# EAGLE board Microcontroller (EAGLE 9.3.0)
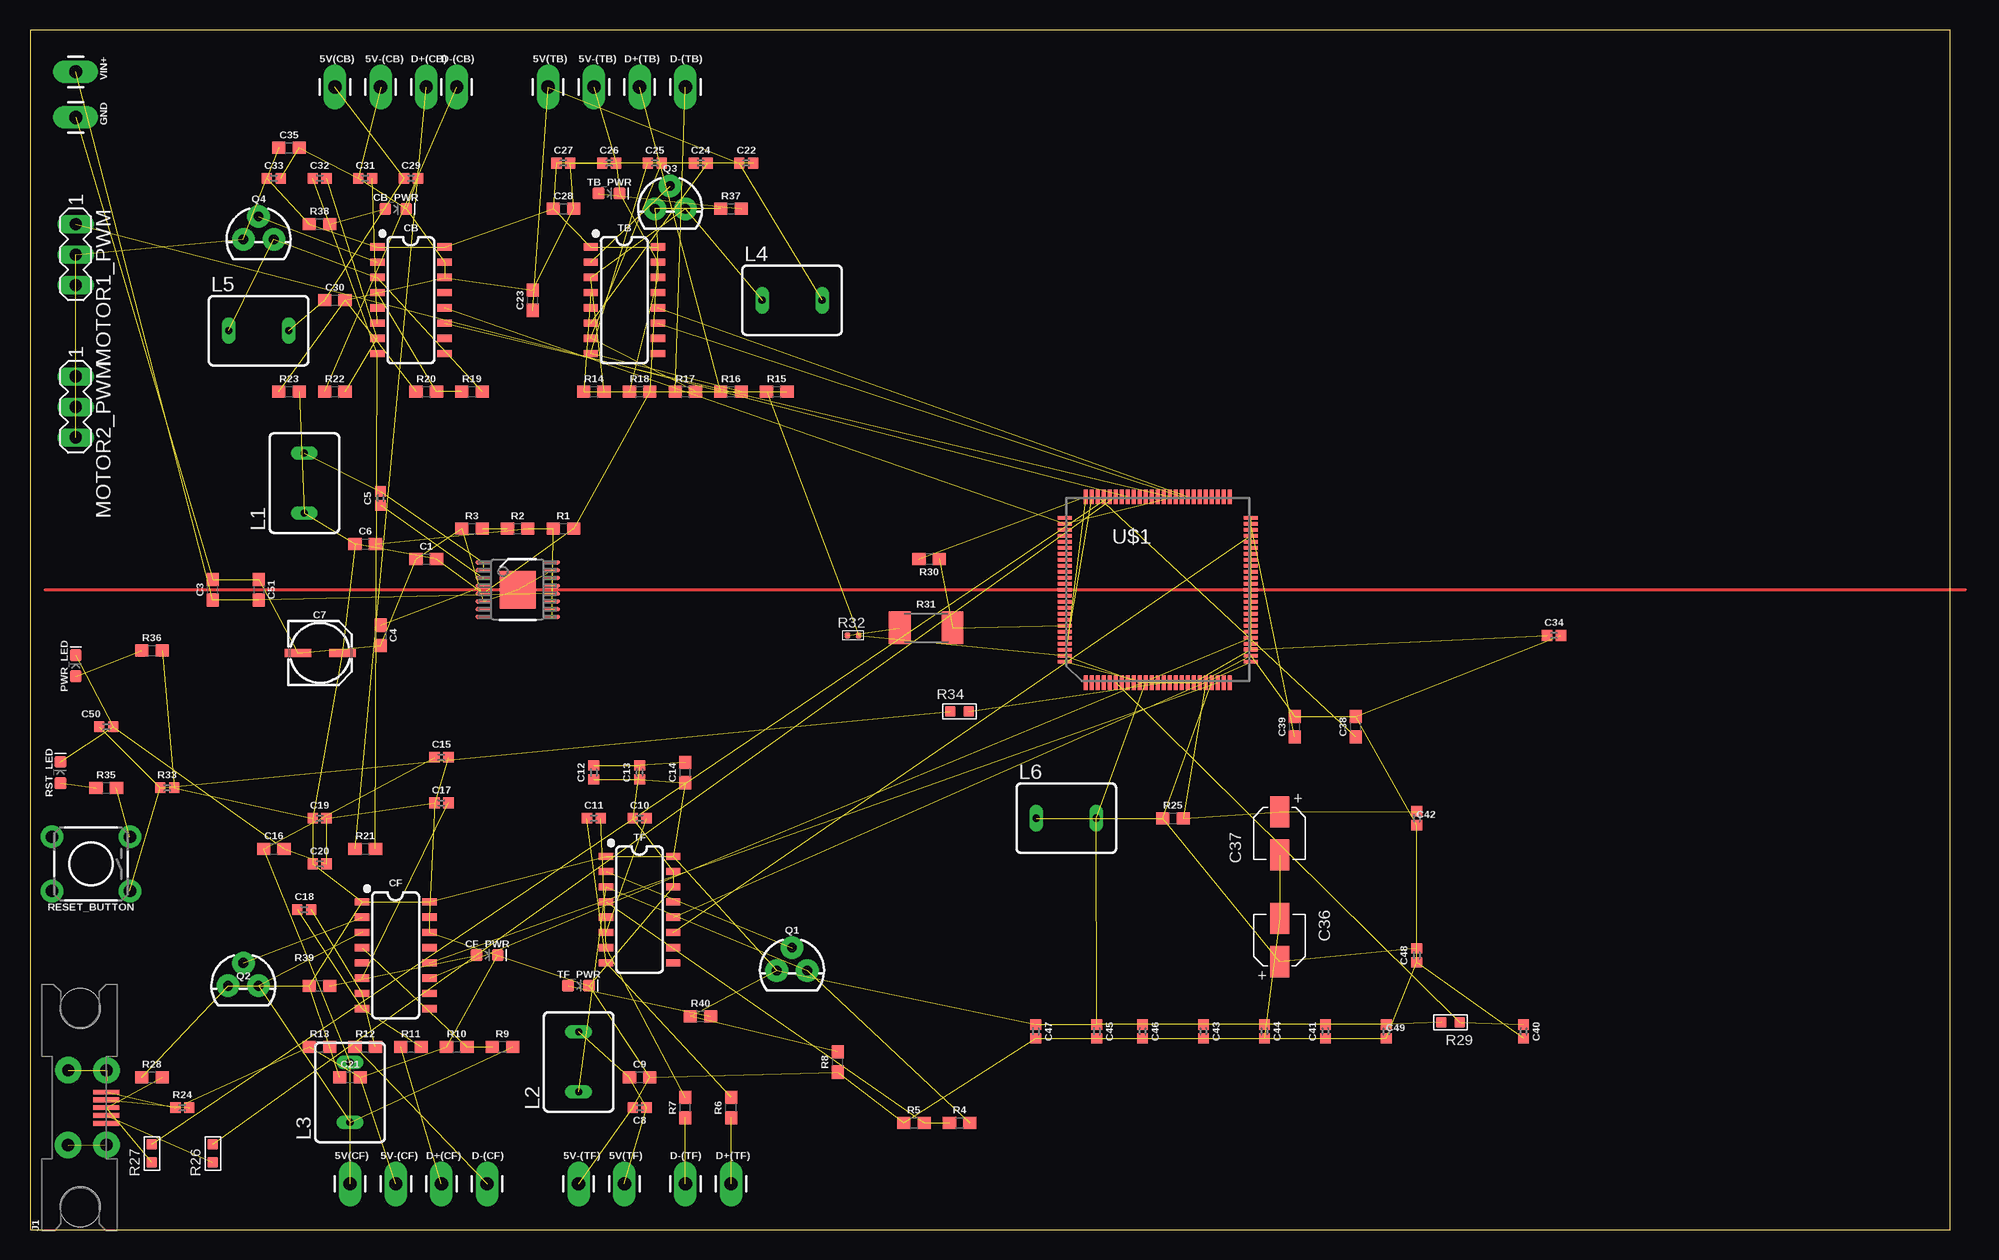
[diagram p0: board, top side]

Size 160 x 100 mm. Coordinates in mm from the lower left corner, seen from the top.
Outline: 0,0 160,0 160,100 0,100 0,0
Copper layers (1*16): Top 0.035mm / dielectric 1.5mm / Bottom 0.035mm
Design rules "default": minimum track width 6mil, minimum drill 0.35mm, track to track 6mil, track to pad 6mil, pad to pad 6mil, via to via 6mil, smd to smd 6mil, copper to edge 40mil, drill to drill 6mil, minimum pad ring 10mil, minimum via ring 8mil, stop-mask expansion 4mil, vias tented up to drill 0mil, thermal gap 10mil

## Footprints (pad centres in the part's own frame; a part is rotated, then mirrored left to right if it is on the bottom)
1X01_LONGPAD = drill 1.118 pad 1.88 long: 1 0,0
0603 = smd 1.1 x 1: 1 -0.85,0; 2 0.85,0
0402 = smd 0.85 x 0.9: 1 -0.58,0; 2 0.58,0
PANASONIC_C = smd 2.2 x 0.65: + 1.9,-0.2; - -1.8,-0.2
2.6X1.6X1(BXCXA) = smd 2.6 x 1.6: 1 1.8,0; 2 -1.8,0
SO16 = smd 0.6 x 1.2: 1 -4.445,-2.8; 2 -3.175,-2.8; 3 -1.905,-2.8; 4 -0.635,-2.8; 5 0.635,-2.8; 6 1.905,-2.8; 7 3.175,-2.8; 8 4.445,-2.8; 9 4.445,2.8; 10 3.175,2.8; 11 1.905,2.8; 12 0.635,2.8; 13 -0.635,2.8; 14 -1.905,2.8; 15 -3.175,2.8; 16 -4.445,2.8
LED-0603 = smd 1 x 1: A -0.877,0; C 0.877,0
USB_MICROB_VERTICAL = smd 0.4 x 2.2: D+ 0,0; D- -0.65,0; GND 1.3,0; ID 0.65,0; VBUS -1.3,0 | drill 1.016 pad 2.2: SHLD1 -3.121,3.183; SHLD2 3.122,3.16; SHLD3 -3.098,-0.027; SHLD4 3.108,-0.026 | hole 3.3: -8.275,2.17; 8.275,2.17
BS75 = drill 0.6 long: 1 -2.5,0; 2 2.5,0
MA03-1 = drill 1.016 long: 1 -2.54,0; 2 0,0; 3 2.54,0
TO-92-EZ = drill 0.813 pad 1.88: 1 -1.27,0; 2 0,1.905; 3 1.27,0
R0603 = smd 0.889 x 0.889: 1 0,0.762; 2 0,-0.762
2010 = smd 1.8 x 2.7: 1 -2.2,0; 2 2.2,0
R0402 = smd 0.5 x 0.5: 1 0,0.463; 2 0,-0.463
TACTILE_SWITCH_PTH_6.0MM = drill 1.016 pad 1.88: 1 -3.251,2.261; 2 3.251,2.261; 3 -3.251,-2.261; 4 3.251,-2.261
PWP0016F = smd 1.3 x 0.35: 1 -2.875,2.275; 2 -2.875,1.625; 3 -2.875,0.975; 4 -2.875,0.325; 5 -2.875,-0.325; 6 -2.875,-0.975; 7 -2.875,-1.625; 8 -2.875,-2.275; 9 2.875,-2.275; 10 2.875,-1.625; 11 2.875,-0.975; 12 2.875,-0.325; 13 2.875,0.325; 14 2.875,0.975; 15 2.875,1.625; 16 2.875,2.275 | smd 3 x 3.1: 17 0,0 | smd 0.4 x 0.4: V -1,0
LQFP100 = smd 1.2 x 0.3: BOOT0 -7.75,-3; PA3 7.75,-6.016; PA4 7.75,-4.5; PA5 7.75,-4; PA6 7.75,-3.5; PA7 7.75,-3; PA14 -7.75,6; PA15 -7.75,5.5; PB0 7.75,-1.5; PB1 7.75,-1; PB2 7.75,-0.5; PB3 -7.75,-0.5; PB4 -7.75,-1; PB5 -7.75,-1.5; PB6 -7.75,-2; PB7 -7.75,-2.5; PB8 -7.75,-3.5; PB9 -7.75,-4; PB10 7.75,4.5; PB11 7.75,5; PC4 7.75,-2.5; PC5 7.75,-2; PC10 -7.75,5; PC11 -7.75,4.5; PC12 -7.75,4; PD0 -7.75,3.5; PD1 -7.75,3; PD2 -7.75,2.5; PD3 -7.75,2; PD4 -7.75,1.5; PD5 -7.75,1; PD6 -7.75,0.5; PD7 -7.75,0; PDR_ON -7.75,-5.5; PE0 -7.75,-4.5; PE1 -7.75,-5; PE7 7.75,0; PE8 7.75,0.5; PE9 7.75,1; PE10 7.75,1.5; PE11 7.75,2; PE12 7.75,2.5; PE13 7.75,3; PE14 7.75,3.5; PE15 7.75,4; VCAP1 7.75,5.5; VDD3 7.75,-4.984; VDD4 7.75,6; VDD6 -7.75,-6; VSS2 7.75,-5.5 | smd 0.3 x 1.2: NRST 0.5,-7.75; PA0 5,-7.75; PA1 5.5,-7.75; PA2 6,-7.75; PA8 -2,7.75; PA9 -2.5,7.75; PA10 -3,7.75; PA11 -3.5,7.75; PA12 -4,7.75; PA13 -4.5,7.75; PB12 6,7.75; PB13 5.5,7.75; PB14 5,7.75; PB15 4.5,7.75; PC0 1,-7.75; PC1 1.5,-7.75; PC2 2,-7.75; PC3 2.5,-7.75; PC6 0,7.75; PC7 -0.5,7.75; PC8 -1,7.75; PC9 -1.5,7.75; PC13 -3,-7.75; PC14 -2.5,-7.75; PC15 -2,-7.75; PD8 4,7.75; PD9 3.5,7.75; PD10 3,7.75; PD11 2.5,7.75; PD12 2,7.75; PD13 1.5,7.75; PD14 1,7.75; PD15 0.5,7.75; PE2 -6,-7.75; PE3 -5.5,-7.75; PE4 -5,-7.75; PE5 -4.5,-7.75; PE6 -4,-7.75; PH0 -0.5,-7.75; PH1 0,-7.75; VBAT -3.5,-7.75; VCAP2 -5,7.75; VDD1 -1,-7.75; VDD2 3,-7.75; VDD5 -6,7.75; VDDA 4.5,-7.75; VREF+ 4,-7.75; VSS1 -1.5,-7.75; VSS3 -5.5,7.75; VSSA 3.5,-7.75

## Placement (x,y rotation side)
5V(CB)  [1X01_LONGPAD]  25.4,95.25 0 top
5V(CF)  [1X01_LONGPAD]  26.67,3.81 0 top
5V(TB)  [1X01_LONGPAD]  43.18,95.25 0 top
5V(TF)  [1X01_LONGPAD]  49.53,3.81 0 top
5V-(CB)  [1X01_LONGPAD]  29.21,95.25 0 top
5V-(CF)  [1X01_LONGPAD]  30.48,3.81 0 top
5V-(TB)  [1X01_LONGPAD]  46.99,95.25 0 top
5V-(TF)  [1X01_LONGPAD]  45.72,3.81 0 top
C1  4.7uF  [0603]  33.02,55.88 0 top
C3  2.2uF  [0603]  15.24,53.34 90 top
C4  2.2uF  [0603]  29.21,49.53 270 top
C5  470nF  [0402]  29.21,60.96 90 top
C6  10pF  [0603]  27.94,57.15 0 top
C7  22uF  [PANASONIC_C]  24.13,48.26 0 top
C8  0.1uF  [0402]  50.8,10.16 180 top
C9  10uF  [0603]  50.8,12.7 0 top
C10  0.1uF  [0402]  50.8,34.29 0 top
C11  0.1uF  [0402]  46.99,34.29 0 top
C12  0.1uF  [0402]  46.99,38.1 90 top
C13  0.1uF  [0402]  50.8,38.1 90 top
C14  10uF  [0603]  54.61,38.1 90 top
C15  0.1uF  [0402]  34.29,39.37 0 top
C16  10uF  [0603]  20.32,31.75 0 top
C17  0.1uF  [0402]  34.29,35.56 0 top
C18  0.1uF  [0402]  22.86,26.67 0 top
C19  0.1uF  [0402]  24.13,34.29 0 top
C20  0.1uF  [0402]  24.13,30.48 0 top
C21  10uF  [0603]  26.67,12.7 0 top
C22  0.1uF  [0402]  59.69,88.9 0 top
C23  10uF  [0603]  41.91,77.47 90 top
C24  0.1uF  [0402]  55.88,88.9 0 top
C25  0.1uF  [0402]  52.07,88.9 0 top
C26  0.1uF  [0402]  48.26,88.9 0 top
C27  0.1uF  [0402]  44.45,88.9 0 top
C28  10uF  [0603]  44.45,85.09 0 top
C29  0.1uF  [0402]  31.75,87.63 0 top
C30  10uF  [0603]  25.4,77.47 0 top
C31  0.1uF  [0402]  27.94,87.63 0 top
C32  0.1uF  [0402]  24.13,87.63 0 top
C33  0.1uF  [0402]  20.32,87.63 0 top
C34  0.1uF  [0402]  127,49.53 0 top
C35  10uF  [0603]  21.59,90.17 0 top
C36  [2.6X1.6X1(BXCXA)]  104.14,24.13 270 top
C37  [2.6X1.6X1(BXCXA)]  104.14,33.02 90 top
C38  2.2uF  [0603]  110.49,41.91 90 top
C39  2.2uF  [0603]  105.41,41.91 90 top
C40  1.0uF  [0402]  124.46,16.51 270 top
C41  0.1uF  [0402]  107.95,16.51 90 top
C42  0.1uF  [0402]  115.57,34.29 270 top
C43  0.1uF  [0402]  97.79,16.51 270 top
C44  0.1uF  [0402]  102.87,16.51 270 top
C45  0.1uF  [0402]  88.9,16.51 270 top
C46  0.1uF  [0402]  92.71,16.51 270 top
C47  0.1uF  [0402]  83.82,16.51 270 top
C48  0.1uF  [0402]  115.57,22.86 90 top
C49  0.1uF  [0402]  113.03,16.51 270 top
C50  0.1uF  [0402]  6.35,41.91 0 top
C51  4.7uF  [0603]  19.05,53.34 270 top
CB  HX711  [SO16]  31.75,77.47 270 top
CB_PWR  WHITE  [LED-0603]  30.48,85.09 0 top
CF  HX711  [SO16]  30.48,22.86 270 top
CF_PWR  WHITE  [LED-0603]  38.1,22.86 0 top
D+(CB)  [1X01_LONGPAD]  33.02,95.25 0 top
D+(CF)  [1X01_LONGPAD]  34.29,3.81 0 top
D+(TB)  [1X01_LONGPAD]  50.8,95.25 0 top
D+(TF)  [1X01_LONGPAD]  58.42,3.81 0 top
D-(CB)  [1X01_LONGPAD]  35.56,95.25 0 top
D-(CF)  [1X01_LONGPAD]  38.1,3.81 0 top
D-(TB)  [1X01_LONGPAD]  54.61,95.25 0 top
D-(TF)  [1X01_LONGPAD]  54.61,3.81 0 top
GND  [1X01_LONGPAD]  3.81,92.71 270 top
J1  [USB_MICROB_VERTICAL]  6.35,10.16 90 top
L1  [BS75]  22.86,62.23 90 top
L2  [BS75]  45.72,13.97 90 top
L3  [BS75]  26.67,11.43 90 top
L4  [BS75]  63.5,77.47 0 top
L5  [BS75]  19.05,74.93 0 top
L6  [BS75]  86.36,34.29 0 top
MOTOR1_PWM  [MA03-1]  3.81,81.28 270 top
MOTOR2_PWM  [MA03-1]  3.81,68.58 270 top
PWR_LED  BLUE  [LED-0603]  3.81,46.99 90 top
Q1  200mA/40V  [TO-92-EZ]  63.5,21.59 0 top
Q2  200mA/40V  [TO-92-EZ]  17.78,20.32 0 top
Q3  200mA/40V  [TO-92-EZ]  53.34,85.09 0 top
Q4  200mA/40V  [TO-92-EZ]  19.05,82.55 0 top
R1  1M  [0603]  44.45,58.42 0 top
R2  3.9k  [0603]  40.64,58.42 0 top
R3  2.0k  [0603]  36.83,58.42 0 top
R4  20k  [0603]  77.47,8.89 0 top
R5  8.2k  [0603]  73.66,8.89 0 top
R6  100  [0603]  58.42,10.16 90 top
R7  100  [0603]  54.61,10.16 90 top
R8  10k  [0603]  67.31,13.97 90 top
R9  20k  [0603]  39.37,15.24 0 top
R10  8.2k  [0603]  35.56,15.24 0 top
R11  100  [0603]  31.75,15.24 0 top
R12  100  [0603]  27.94,15.24 0 top
R13  10k  [0603]  24.13,15.24 0 top
R14  20k  [0603]  46.99,69.85 0 top
R15  8.2k  [0603]  62.23,69.85 0 top
R16  100  [0603]  58.42,69.85 0 top
R17  100  [0603]  54.61,69.85 0 top
R18  10k  [0603]  50.8,69.85 0 top
R19  20k  [0603]  36.83,69.85 0 top
R20  8.2k  [0603]  33.02,69.85 0 top
R21  100  [0603]  27.94,31.75 0 top
R22  100  [0603]  25.4,69.85 0 top
R23  10k  [0603]  21.59,69.85 0 top
R24  100K  [0402]  12.7,10.16 0 top
R25  47k  [0603]  95.25,34.29 0 top
R26  0R  [R0603]  15.24,6.35 0 top
R27  0R  [R0603]  10.16,6.35 0 top
R28  1.5k  [0603]  10.16,12.7 0 top
R29  0R  [R0603]  118.36,17.27 90 top
R30  10k  [0603]  74.93,55.88 180 top
R31  510  [2010]  74.68,50.16 0 top
R32  0R  [R0402]  68.58,49.53 90 top
R33  100K  [0402]  11.43,36.83 0 top
R34  0R  [R0603]  77.47,43.18 270 top
R35  680  [0603]  6.35,36.83 0 top
R36  680  [0603]  10.16,48.26 0 top
R37  680  [0603]  58.42,85.09 0 top
R38  680  [0603]  24.13,83.82 0 top
R39  680  [0603]  24.13,20.32 0 top
R40  680  [0603]  55.88,17.78 0 top
RESET_BUTTON  MOMENTARY-SWITCH-SPST-PTH-6.0MM  [TACTILE_SWITCH_PTH_6.0MM]  5.08,30.48 180 top
RST_LED  RED  [LED-0603]  2.54,38.1 90 top
TB  HX711  [SO16]  49.53,77.47 270 top
TB_PWR  WHITE  [LED-0603]  48.26,86.36 0 top
TF  HX711  [SO16]  50.8,26.67 270 top
TF_PWR  WHITE  [LED-0603]  45.72,20.32 0 top
U1  LM46000PWPR  [PWP0016F]  40.64,53.34 0 top
U$1  STM32F4V_100PIN_GENERIC  [LQFP100]  93.98,53.34 0 top
VIN+  [1X01_LONGPAD]  3.81,96.52 270 top

## Library data of the parts
5V(CB) 5V(CF) 5V(TB) 5V(TF) 5V-(CB) 5V-(CF) 5V-(TB) 5V-(TF) D+(CB) D+(CF) D+(TB) D+(TF) D-(CB) D-(CF) D-(TB) D-(TF) GND VIN+ = SparkFun-Connectors
C1 C51 = SparkFun-Capacitors; PROD_ID: CAP-08280
C3 C4 C38 C39 = SparkFun-Capacitors; PROD_ID: CAP-07888
C5 = SparkFun-Capacitors; PROD_ID: CAP-09041
C6 = SparkFun-Capacitors; PROD_ID: CAP-11812
C7 = SparkFun-Capacitors; PROD_ID: CAP-08618
C8 C10-C13 C15 C17-C20 C22 C24-C27 C29 C31-C34 C41-C50 = SparkFun-Capacitors; PROD_ID: CAP-12416
C9 C14 C16 C21 C23 C28 C30 C35 = SparkFun-Capacitors; PROD_ID: CAP-11015
C36 C37 = Wurth_Elektronik_Passive_Capacitors_rev18b; WE-NUMBER: 865230640005/1uF
C40 = SparkFun-Capacitors; PROD_ID: CAP-12417
CB CF TB TF = SparkFun-IC-Conversion; PROD_ID: IC-12445
CB_PWR CF_PWR TB_PWR TF_PWR = SparkFun-LED; PROD_ID: DIO-09004
J1 = SparkFun-Connectors; PROD_ID: CONN-09900
L1-L6 = inductor-neosid; OC_FARNELL: unknown; OC_NEWARK: unknown
MOTOR1_PWM MOTOR2_PWM = con-lstb; OC_FARNELL: unknown; OC_NEWARK: unknown
PWR_LED = SparkFun-LED; PROD_ID: DIO-08575
Q1-Q4 = SparkFun-DiscreteSemi; PROD_ID: TRANS-08447
R1 = SparkFun-Resistors; PROD_ID: RES-07868
R2 = SparkFun-Resistors; PROD_ID: RES-08701
R3 = SparkFun-Resistors; PROD_ID: RES-08296
R4 R9 R14 R19 = SparkFun-Resistors; PROD_ID: RES-09383
R5 R10 R15 R20 = SparkFun-Resistors; PROD_ID: RES-10646
R6 R7 R11 R12 R16 R17 R21 R22 = SparkFun-Resistors; PROD_ID: RES-12438
R8 R13 R18 R23 R30 = SparkFun-Resistors; PROD_ID: RES-00824
R24 R33 = SparkFun-Resistors; PROD_ID: RES-13495
R25 = SparkFun-Resistors; PROD_ID: RES-07871
R26 R27 R29 R34 = OPL_Resistor; MPN: RC0603JR-070RL
R28 = SparkFun-Resistors; PROD_ID: RES-08306
R31 = SparkFun-Resistors; PROD_ID: RES-08717
R32 = OPL_Resistor; MPN: RC0402JR-070RL
R35-R40 = SparkFun-Resistors; PROD_ID: RES-09333
RESET_BUTTON = SparkFun-Switches; PROD_ID: SWCH-08441; SF_SKU: COM-00097
RST_LED = SparkFun-LED; PROD_ID: DIO-00819
U1 = LM46000; ADDRESS1: Not shown in title block; ADDRESS2: Not shown in title block; ADDRESS3: Not shown in title block; ADDRESS4: Not shown in title block; ALTERNATEMANUFACTURER: None; APPROVEDBY: Not shown in title block; AUTHOR: Not shown in title block; CHECKEDBY: Not shown in title block; COMPANYNAME: Not shown in title block; COMPONENTLINK1DESCRIPTION: Datasheet Link; COMPONENTLINK1URL: NA; COMPTYPE: IC; CURRENTDATE: Not shown in title block; CURRENTTIME: Not shown in title block; DATE: Not shown in title block; DESIGNATOR: U?; DOCUMENTFULLPATHANDNAME: Not shown in title block; DOCUMENTNAME: Not shown in title block; DOCUMENTNUMBER: 1; ENGINEER: Not shown in title block; IMAGEPATH: Not shown in title block; LATESTREVISIONDATE: 20140220; MANUFACTURER: Texas Instruments; MODIFIEDDATE: Not shown in title block; MOUNTTYPE: SMT; ORGANIZATION: Not shown in title block; PACKAGEREFERENCE: PWP0016F; PARTNUMBER: LM46000PWP; PIN_COUNT: 17; PROJECTNAME: *; PUBLISHER: Texas Instruments; REVISION: Use project parameter SCH_Rev; ROHS: Y; RULE: *; SHEETNUMBER: 1; SHEETTOTAL: 1; SYMBOLCREATOR: x0208326; SYMBOLVERSION: 20140214; TIME: Not shown in title block; UM: EA
U$1 = stm32f4

## Nets
3.3V: 5V-(CB).1 5V-(CF).1 5V-(TB).1 5V-(TF).1 C8.2 C9.2 C10.1 C12.2 C13.2 C14.2 C15.2 C16.2 C17.1 C19.2 C20.2 C21.2 C22.2 C23.2 C24.1 C26.2 C27.2 C28.2 C29.2 C30.2 C31.1 C33.2 C34.2 C35.2 C36.2 C37.2 C38.2 C39.2 C40.2 C41.1 C42.2 C43.2 C44.2 C45.2 C46.2 C47.2 C48.1 C49.2 C50.2 CB.14 CB.15 CB_PWR.C CF.14 CF.15 CF_PWR.C J1.GND J1.SHLD1 J1.SHLD2 J1.SHLD3 J1.SHLD4 PWR_LED.C R5.1 R8.1 R10.1 R13.1 R15.1 R18.1 R20.1 R23.1 R24.1 R32.2 RST_LED.C TB.14 TB.15 TB_PWR.C TF.14 TF.15 TF_PWR.C U$1.PDR_ON U$1.VSS1 U$1.VSS2 U$1.VSS3 U$1.VSSA
3.6V+: C1.2 C6.1 C7.+ C12.1 C13.1 C14.1 C19.1 C20.1 C21.1 C26.1 C27.1 C28.1 C33.1 C34.1 C35.1 C41.2 C43.1 C44.1 C45.1 C46.1 C47.1 C49.1 CB.1 CB.16 CF.1 CF.16 L1.1 L6.2 MOTOR1_PWM.2 MOTOR2_PWM.2 Q1.1 Q2.1 Q3.1 Q4.1 R1.2 R8.2 R13.2 R18.2 R23.2 R28.1 R29.1 R30.2 R33.2 R36.2 R37.1 R38.1 R39.1 R40.1 TB.1 TB.16 TF.1 TF.16 U1.5 U$1.VDD1 U$1.VDD2 U$1.VDD3 U$1.VDD4 U$1.VDD5 U$1.VDD6
3.6V-: C1.1 C3.2 C4.2 C7.- C51.1 GND.1 R3.1 U1.6 U1.10 U1.15 U1.16 U1.17
ANALOG1: U$1.PD15
DOUT(CB): CB.12 U$1.PA15 U$1.PD13
DOUT(CF): CF.12 U$1.PA0
DOUT(TB): TB.12 U$1.PD11
DOUT(TF): TF.12 U$1.PA3
GND: MOTOR1_PWM.3 MOTOR2_PWM.3
N$1: C3.1 C51.2 U1.12 U1.13 U1.14 VIN+.1
N$2: L2.1 Q1.3 R4.2 TF.3
N$3: C5.2 L1.2 U1.1 U1.2
N$4: C4.1 U1.4
N$5: 5V(TF).1 C8.1 C9.1 L2.2
N$6: C6.2 R1.1 R2.2 U1.9
N$7: R2.1 R3.2
N$8: R4.1 R5.2 TF.4
N$9: D-(TF).1 R7.1
N$10: C5.1 U1.3
N$11: C10.2 TF.6
N$12: C11.2 R7.2 TF.7
N$13: C11.1 R6.2 TF.8
N$14: CF.3 L3.1 Q2.3 R9.2
N$15: Q1.2 TF.2
N$16: D+(TF).1 R6.1
N$17: 5V(CF).1 C15.1 C16.1 L3.2
N$18: CF.4 R9.1 R10.2
N$19: C17.2 CF.6
N$20: D-(CF).1 R12.1
N$21: C18.2 CF.7 R12.2
N$22: C18.1 CF.8 R11.2
N$23: D+(CF).1 R11.1
N$24: CF.2 Q2.2
N$25: L4.1 Q3.3 R14.2 TB.3
N$26: 5V(TB).1 C22.1 C23.1 L4.2
N$27: R14.1 R15.2 TB.4
N$28: C24.2 TB.6
N$29: D-(TB).1 R17.1
N$30: C25.2 R17.2 TB.7
N$31: C25.1 R16.2 TB.8
N$32: D+(TB).1 R16.1
N$33: Q3.2 TB.2
N$34: CB.3 L5.1 Q4.3 R19.2
N$35: 5V(CB).1 C29.1 C30.1 L5.2
N$36: CB.4 R19.1 R20.2
N$37: C31.2 CB.6
N$38: D-(CB).1 R22.1
N$39: C32.2 CB.7 R22.2
N$40: C32.1 CB.8 R21.2
N$41: D+(CB).1 R21.1
N$42: CB.2 Q4.2
N$43: C39.1 U$1.VCAP1
N$44: C38.1 U$1.VCAP2
N$45: J1.D- R26.2
N$46: J1.D+ R27.2 R28.2
N$47: R30.1 R31.2 U$1.BOOT0
N$48: J1.ID R24.2
N$49: R31.1 R32.1
N$50: C50.1 R33.1 R34.2 RESET_BUTTON.1
N$51: R35.1 RST_LED.A
N$52: R35.2 RESET_BUTTON.3
N$53: C37.1 C42.1 R25.2 U$1.VREF+
N$54: PWR_LED.A R36.1
N$55: CF_PWR.A R39.2
N$56: CB_PWR.A R38.2
N$57: R40.2 TF_PWR.A
N$58: R37.2 TB_PWR.A
NRST: R34.1 U$1.NRST
PWM(LEFT): MOTOR1_PWM.1 U$1.PA9
PWM(RIGHT: MOTOR2_PWM.1
PWM(RIGHT): U$1.PA4
SCK(CB): CB.11 U$1.PD14
SCK(CF): CF.11 U$1.PA5
SCK(TB): TB.11 U$1.PD12
SCK(TF): TF.11 U$1.PB10
SWCLK: U$1.PA14
SWDIO: U$1.PA13
USB_5V: J1.VBUS
USB_DM: R26.1 U$1.PA11
USB_DP: R27.1 U$1.PA12
VBAT: C40.1 R29.2 U$1.VBAT
VDDA: C36.1 C48.2 L6.1 R25.1 U$1.VDDA

## Tracks (layer width: path | path; a pad name or v marks a point on that pad's centre or on a via)
3.3V  (76 unrouted)
3.6V+  (58 unrouted)
3.6V-  (11 unrouted)
DOUT(CB)  (2 unrouted)
DOUT(CF)  (1 unrouted)
DOUT(TB)  (1 unrouted)
DOUT(TF)  (1 unrouted)
GND  (1 unrouted)
N$1  (5 unrouted)
N$2  (3 unrouted)
N$3  (3 unrouted)
N$4  (1 unrouted)
N$5  (3 unrouted)
N$6  (3 unrouted)
N$7  (1 unrouted)
N$8  (2 unrouted)
N$9  (1 unrouted)
N$10  (1 unrouted)
N$11  (1 unrouted)
N$12  (2 unrouted)
N$13  (2 unrouted)
N$14  (3 unrouted)
N$15  (1 unrouted)
N$16  (1 unrouted)
N$17  (3 unrouted)
N$18  (2 unrouted)
N$19  (1 unrouted)
N$20  (1 unrouted)
N$21  (2 unrouted)
N$22  (2 unrouted)
N$23  (1 unrouted)
N$24  (1 unrouted)
N$25  (3 unrouted)
N$26  (3 unrouted)
N$27  (2 unrouted)
N$28  (1 unrouted)
N$29  (1 unrouted)
N$30  (2 unrouted)
N$31  (2 unrouted)
N$32  (1 unrouted)
N$33  (1 unrouted)
N$34  (3 unrouted)
N$35  (3 unrouted)
N$36  (2 unrouted)
N$37  (1 unrouted)
N$38  (1 unrouted)
N$39  (2 unrouted)
N$40  (2 unrouted)
N$41  (1 unrouted)
N$42  (1 unrouted)
N$43  (1 unrouted)
N$44  (1 unrouted)
N$45  (1 unrouted)
N$46  (2 unrouted)
N$47  (2 unrouted)
N$48  (1 unrouted)
N$49  (1 unrouted)
N$50  (3 unrouted)
N$51  (1 unrouted)
N$52  (1 unrouted)
N$53  (3 unrouted)
N$54  (1 unrouted)
N$55  (1 unrouted)
N$56  (1 unrouted)
N$57  (1 unrouted)
N$58  (1 unrouted)
N$59
  Top 0.254: 1.27,53.34 161.29,53.34
NRST  (1 unrouted)
PWM(LEFT)  (1 unrouted)
SCK(CB)  (1 unrouted)
SCK(CF)  (1 unrouted)
SCK(TB)  (1 unrouted)
SCK(TF)  (1 unrouted)
USB_DM  (1 unrouted)
USB_DP  (1 unrouted)
VBAT  (2 unrouted)
VDDA  (4 unrouted)